# EAGLE board Qwiic_Hall_Effect_Sensor_TMAG5273 (EAGLE 9.6.2)
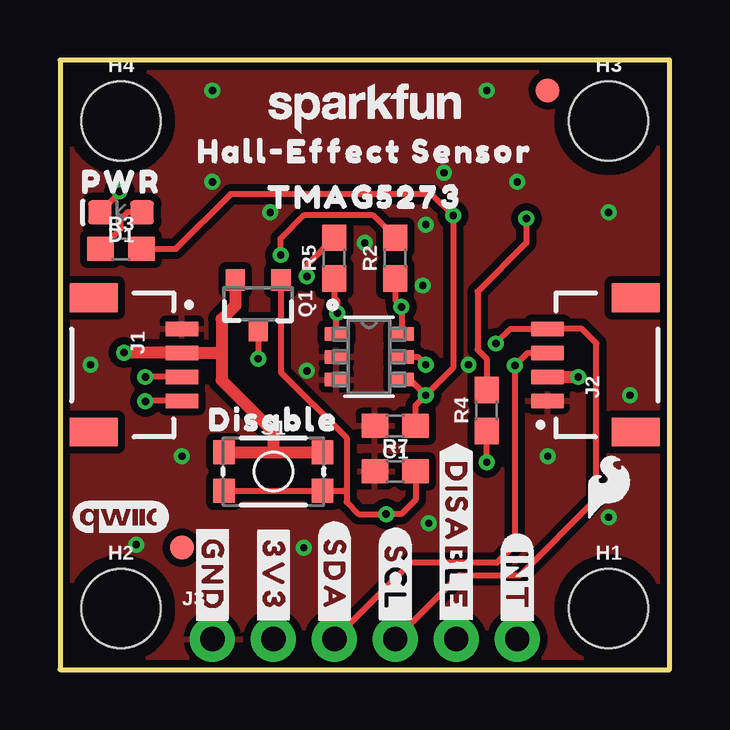
[diagram p0: board, top side]
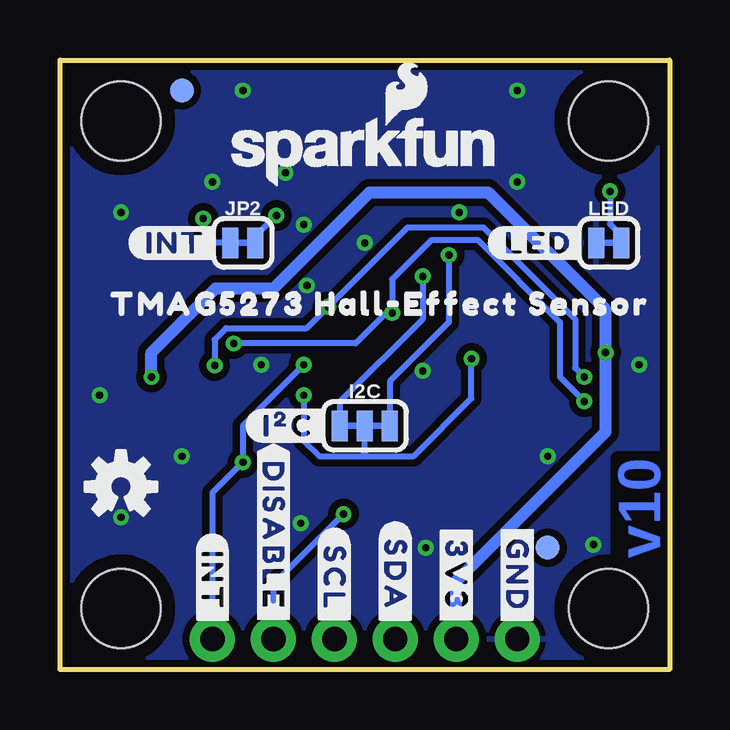
[diagram p1: board, bottom side, seen from below]

Size 25.4 x 25.4 mm. Coordinates in mm from the lower left corner, seen from the top.
Outline: 0,0 25.4,0 25.4,25.4 0,25.4 0,0
Copper layers (1*16): Top 0.035mm / dielectric 1.5mm / Bottom 0.035mm
Design rules "SparkFun-2-Layer-General-JLCPCB": minimum track width 7mil, minimum drill 0.3mm, track to track 7mil, track to pad 7mil, pad to pad 7mil, via to via 7mil, smd to smd 7mil, copper to edge 7mil, drill to drill 7mil, minimum pad ring 7mil, minimum via ring 7mil, stop-mask expansion 3mil, vias tented up to drill 25mil, thermal gap 10mil

## Footprints (pad centres in the part's own frame; a part is rotated, then mirrored left to right if it is on the bottom)
0603 = smd 1.1 x 1: 1 -0.85,0; 2 0.85,0
LED-0603 = smd 1 x 1: A -0.877,0; C 0.877,0
FIDUCIAL-1X2 = smd 1 x 1: 1 0,0
STAND-OFF = hole 3.302: 0,0
SMT-JUMPER_3_2-NC_TRACE_SILK = smd 0.66 x 1.27: 1 -1.041,0; 2 0,0; 3 1.041,0
JST04_1MM_RA = smd 0.6 x 1.35: 1 -1.5,0; 2 -0.5,0; 3 0.5,0; 4 1.5,0 | smd 1.2 x 2: NC1 2.8,-3.675; NC2 -2.8,-3.675
1X06_NO_SILK = drill 1.016 pad 1.88: 1 0,0; 2 2.54,0; 3 5.08,0; 4 7.62,0; 5 10.16,0; 6 12.7,0
SMT-JUMPER_2_NC_TRACE_SILK = smd 0.66 x 1.27: 1 -0.521,0; 2 0.521,0
SOT23-3 = smd 0.8 x 0.9: 1 -0.95,-1; 2 0.95,-1; 3 0,1.1
TACTILE_SWITCH_SMD_4.6X2.8MM = smd 0.9 x 1: 1 -2.05,-0.8; 2 2.05,-0.8; 3 2.05,0.8; 4 -2.05,0.8
SOT23-6_DBV_TEX = smd 0.978 x 0.559: 1 -1.365,0.95; 2 -1.365,0; 3 -1.365,-0.95; 4 1.365,-0.95; 5 1.365,0; 6 1.365,0.95

## Placement (x,y rotation side)
C1  0.1uF  [0603]  13.97,10.16 180 top
D1  Red  [LED-0603]  2.54,19.05 180 top
FD1  FIDUCIAL1X2  [FIDUCIAL-1X2]  5.08,5.08 0 bottom
FD2  FIDUCIAL1X2  [FIDUCIAL-1X2]  5.08,5.08 0 top
FD3  FIDUCIAL1X2  [FIDUCIAL-1X2]  20.32,24.13 0 bottom
FD4  FIDUCIAL1X2  [FIDUCIAL-1X2]  20.32,24.13 0 top
FRAME1  FRAME-LETTER  [CREATIVE_COMMONS]  -6.35,-40.64 0 top  (outside the outline)
H1  STAND-OFF  [STAND-OFF]  22.86,2.54 0 top
H2  STAND-OFF  [STAND-OFF]  2.54,2.54 0 top
H3  STAND-OFF  [STAND-OFF]  22.86,22.86 0 top
H4  STAND-OFF  [STAND-OFF]  2.54,22.86 0 top
I2C  JUMPER-SMT_3_2-NC_TRACE_SILK  [SMT-JUMPER_3_2-NC_TRACE_SILK]  12.7,10.16 0 bottom
J1  QWIIC_RIGHT_ANGLE  [JST04_1MM_RA]  5.08,12.7 270 top
J2  QWIIC_RIGHT_ANGLE  [JST04_1MM_RA]  20.32,12.7 90 top
J3  [1X06_NO_SILK]  6.35,1.27 0 top
JP2  JUMPER-SMT_2_NC_TRACE_SILK  [SMT-JUMPER_2_NC_TRACE_SILK]  17.78,17.78 0 bottom
LED  JUMPER-SMT_2_NC_TRACE_SILK  [SMT-JUMPER_2_NC_TRACE_SILK]  2.54,17.78 0 bottom
LOGO1  OSHW-LOGOS  [OSHW-LOGO-S]  22.86,7.62 0 bottom
LOGO2  SFE_LOGO_NAME_FLAME.1_INCH  [SFE_LOGO_NAME_FLAME_.1]  12.7,21.59 0 bottom
LOGO3  QWIIC_LOGO_4MM  [QWIIC_4MM]  2.54,6.35 0 top
LOGO4  SFE_LOGO_NAME8_MM  [SFE_LOGO_NAME_8MM]  12.7,23.5 0 top
LOGO5  SPECIAL_INSTRUCTIONS-ORDERING  [ORDERING_INSTRUCTIONS]  44.45,50.8 0 top  (outside the outline)
LOGO6  SFE_LOGO_FLAME.1_INCH  [SFE_LOGO_FLAME_.1]  22.86,7.62 0 top
Q1  20V/4.2A/52mΩ/1.4W  [SOT23-3]  8.26,15.24 180 top
R2  2.2k  [0603]  13.97,17.14 90 top
R3  4.7k  [0603]  2.54,17.53 0 top
R4  10k  [0603]  17.78,10.79 90 top
R5  2.2k  [0603]  11.43,17.14 90 top
R7  10k  [0603]  13.97,8.26 0 top
S1  [TACTILE_SWITCH_SMD_4.6X2.8MM]  8.89,8.26 0 top
U1  TMAG5273  [SOT23-6_DBV_TEX]  12.88,13.03 0 top
U$1  [#3V3#37]  8.89,3.94 270 top
U$2  [#GND#36]  6.35,3.94 270 top
U$3  [#SDA#37]  11.43,3.94 270 top
U$4  [#SCL#38]  13.97,3.81 270 top
U$5  [#INT#5285]  19.05,3.68 270 top
U$6  [#INT#5289]  20.57,17.78 0 bottom
U$7  [PWR41]  2.54,20.32 0 top
U$8  [#LED#42]  5.46,17.78 0 bottom
U$9  [#DISABLE#5290]  16.51,5.59 270 top
U$10  [#I�C#0]  17.65,10.16 0 bottom
U$11  [HALL#EFFECT_SENSOR45]  12.7,21.59 0 top
U$12  [TMAG527346]  12.7,19.68 0 top
U$13  [DISABLE5281]  8.89,10.41 0 top
U$14  [#SDA#5280]  11.43,3.94 270 bottom
U$15  [#DISABLE#5290]  16.51,5.59 270 bottom
U$16  [#SCL#5281]  13.97,3.81 270 bottom
U$17  [#INT#5285]  19.05,3.68 270 bottom
U$18  [#3V3#0]  8.89,3.94 270 bottom
U$19  [#GND#4]  6.35,3.94 270 bottom
U$20  [TMAG5273_HALL#EFFECT_SENSOR5]  12.06,15.24 0 bottom

## Library data of the parts
C1 = SparkFun-Capacitors; PROD_ID: CAP-16503
D1 = SparkFun-LED; PROD_ID: DIO-17976
FD1-FD4 LOGO1-LOGO6 = SparkFun-Aesthetics
FRAME1 = SparkFun-Aesthetics; DESIGNER: M. Chodikov; REV: v10
H1-H4 = SparkFun-Hardware
I2C JP2 LED = SparkFun-Jumpers
J1 J2 = SparkFun-Connectors; PROD_ID: CONN-13694
J3 = SparkFun-Connectors; PROD_ID: CONN-08437
Q1 = SparkFun-DiscreteSemi; PROD_ID: TRANS-14388
R2 R5 = SparkFun-Resistors; PROD_ID: RES-08272
R3 = SparkFun-Resistors; PROD_ID: RES-07857
R4 R7 = SparkFun-Resistors; PROD_ID: RES-00824
S1 = SparkFun-Switches; PROD_ID: SWCH-15606
U1 = TMAG5273; PROD_ID: ROB-18440
U$1-U$20 = output

## Nets
3.3V: J1.2 J2.2 J3.2 Q1.2 S1.3 S1.4
3.3V_SW: C1.1 I2C.2 JP2.2 Q1.3 R3.2 U1.4
!INT: J3.6 R4.1 U1.5
DISABLE: J3.5 Q1.1 R7.2 S1.1 S1.2
GND: C1.2 J1.1 J2.1 J3.1 LED.1 R7.1 U1.2 U1.3
N$1: D1.C LED.2
N$2: I2C.3 R2.2
N$4: D1.A R3.1
N$5: JP2.1 R4.2
N$6: I2C.1 R5.2
SCL: J1.4 J2.4 J3.4 R5.1 U1.1
SDA: J1.3 J2.3 J3.3 R2.1 U1.6

## Tracks (layer width: path | path; a pad name or v marks a point on that pad's centre or on a via)
3.3V  (via drill 0.3)
  Top 0.508: J2.2 v21.58,12.2 v21.59,12.19 | v2.67,13.21 v2.67,13.2 J1.2 6.72,13.2 6.73,13.21 | S1.4 8.89,9.05 | 8.89,9.05 S1.3 | Q1.2 7.3,15.18 6.73,14.61 6.73,13.21 | 8.89,9.05 8.89,9.91 6.73,12.06 6.73,13.21
  Bottom 0.508: J3.2 8.89,3.68 2.67,9.91 v2.67,13.21 2.67,14.99 7.56,19.88 12.51,19.88 16.51,15.88 18.92,15.88 21.59,13.21 v21.59,12.19
3.3V_SW  (via drill 0.3)
  Top 0.254: R3.2 4.83,17.53 7.11,19.81 15.49,19.81 v16.38,18.92 16.38,12.57 v15.24,11.43 | U1.4 14.59,12.08 v15.24,11.43 | C1.1 14.82,11.01 v15.24,11.43 | Q1.3 v8.26,12.95
  Bottom 0.254: v15.24,11.43 15.24,9.53 14.61,8.89 12.83,8.89 | 12.83,8.89 12.7,9.02 I2C.2 | 12.83,8.89 10.67,8.89 8.26,11.3 v8.26,12.95 | v16.38,18.92 17.26,18.05 JP2.2
!INT  (via drill 0.3)
  Top 0.254: U1.5 14.91,13.03 v15.24,12.7 | v17.78,8.64 R4.1
  Bottom 0.254: J3.6 19.05,7.37 v17.78,8.64 17.78,10.16 v15.24,12.7
DISABLE  (via drill 0.3)
  Top 0.254: Q1.1 9.21,12.38 11.94,9.65 11.94,7.37 | 11.94,7.37 11.94,6.99 12.45,6.48 v13.59,6.48 14.22,6.48 14.82,7.07 R7.2 | S1.1 S1.2 11.85,7.46 11.94,7.37
  Bottom 0.254: v13.59,6.48 16.51,3.56 J3.5
GND  (via drill 0.3)
  other vias: 5.08,8.89 20.32,8.89 19.05,20.32 10.29,12.45 6.35,20.32 15.11,16 16,20.7 8.76,19.05 22.86,6.35 23.75,11.43 12.7,17.78 1.27,12.7 15.37,6.1 17.02,12.7 3.17,5.21 22.86,19.05 17.78,24.13 6.35,24.13 10.16,5.08 15.24,18.54
  pour Top (isolate 0.305): 0,0 25.4,0 25.4,25.4 0,25.4
  pour Bottom (isolate 0.305): 0,0 25.4,0 25.4,25.4 0,25.4
N$1  (via drill 0.3)
  Top 0.254: v2.48,19.93 2.48,19.87 D1.C
  Bottom 0.254: v2.48,19.93 2.48,18.56 2.23,18.31 2.23,17.99 LED.2
N$2  (via drill 0.3)
  Top 0.254: R2.2 13.04,18.92 10.16,18.92 9.2,17.96 v9.2,17.27
  Bottom 0.254: I2C.3 11.66,12.01 9.2,14.48 v9.2,17.27
N$4
  Top 0.254: D1.A 2.79,19.05 2.54,18.8 2.54,18.37 R3.1
N$5  (via drill 0.3)
  Top 0.254: v19.43,18.8 19.43,17.78 17.4,15.75 17.4,13.34 17.78,12.95 R4.2
  Bottom 0.254: JP2.1 18.92,17.78 19.43,18.29 v19.43,18.8
N$6  (via drill 0.3)
  Top 0.254: R5.2 10.29,16.85 v10.29,16.38
  Bottom 0.254: v10.29,16.38 10.29,14.61 13.74,11.15 I2C.1
SCL  (via drill 0.3)
  Top 0.254: R5.1 11.43,15.49 11.56,15.37 v11.56,14.86 11.51,14.81 U1.1 | J1.4 3.58,11.2 v3.56,11.18 | v18.16,13.59 18.77,14.2 J2.4 21.74,14.2 22.35,13.59 22.35,7.11 19.18,3.94 16.64,3.94 J3.4
  Bottom 0.254: v3.56,11.18 4.57,12.19 4.57,14.48 8,17.91 9.91,17.91 11.56,16.26 v11.56,14.86 11.81,14.86 13.08,13.59 v18.16,13.59
SDA  (via drill 0.3)
  Top 0.254: R2.1 13.97,15.41 14.22,15.15 v14.22,15.11 14.24,15.09 U1.6 | J1.3 v3.56,12.2 v3.56,12.19 | J2.3 19.48,13.2 v18.95,12.67 18.95,5.21 18.19,4.45 14.61,4.45 J3.3
  Bottom 0.254: v3.56,12.19 3.94,12.57 3.94,14.61 7.75,18.41 10.92,18.41 v14.22,15.11 15.11,14.22 18.48,14.22 18.95,13.75 v18.95,12.67

## Text on the board
Bottom: v10
Measures: Units in inches
tDocu: Solder Mask: Red / Thickness: 1.6mm / Two layer design / Finish: HASL Lead-Free / Copper Weight: 1oz / Material: TG135-140 | M. Chodikov